# EAGLE board Lilypad_Kompakt-V25 (EAGLE 5.11)
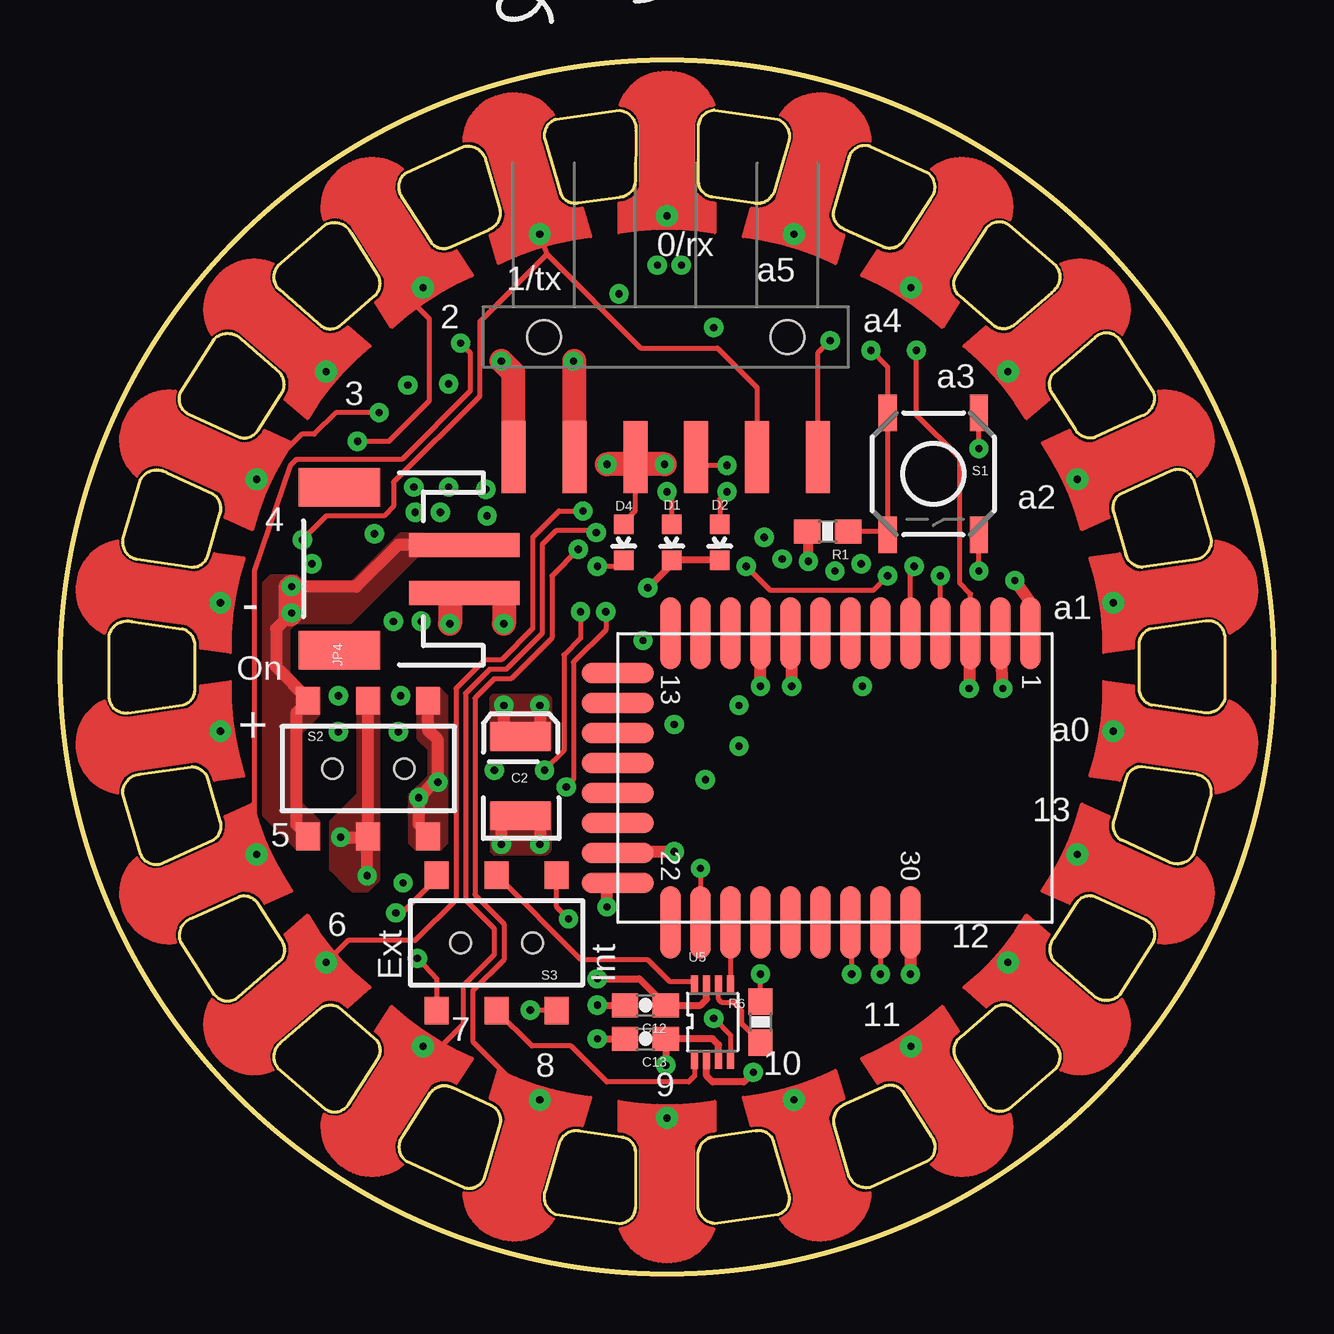
[diagram p0: board, top side]
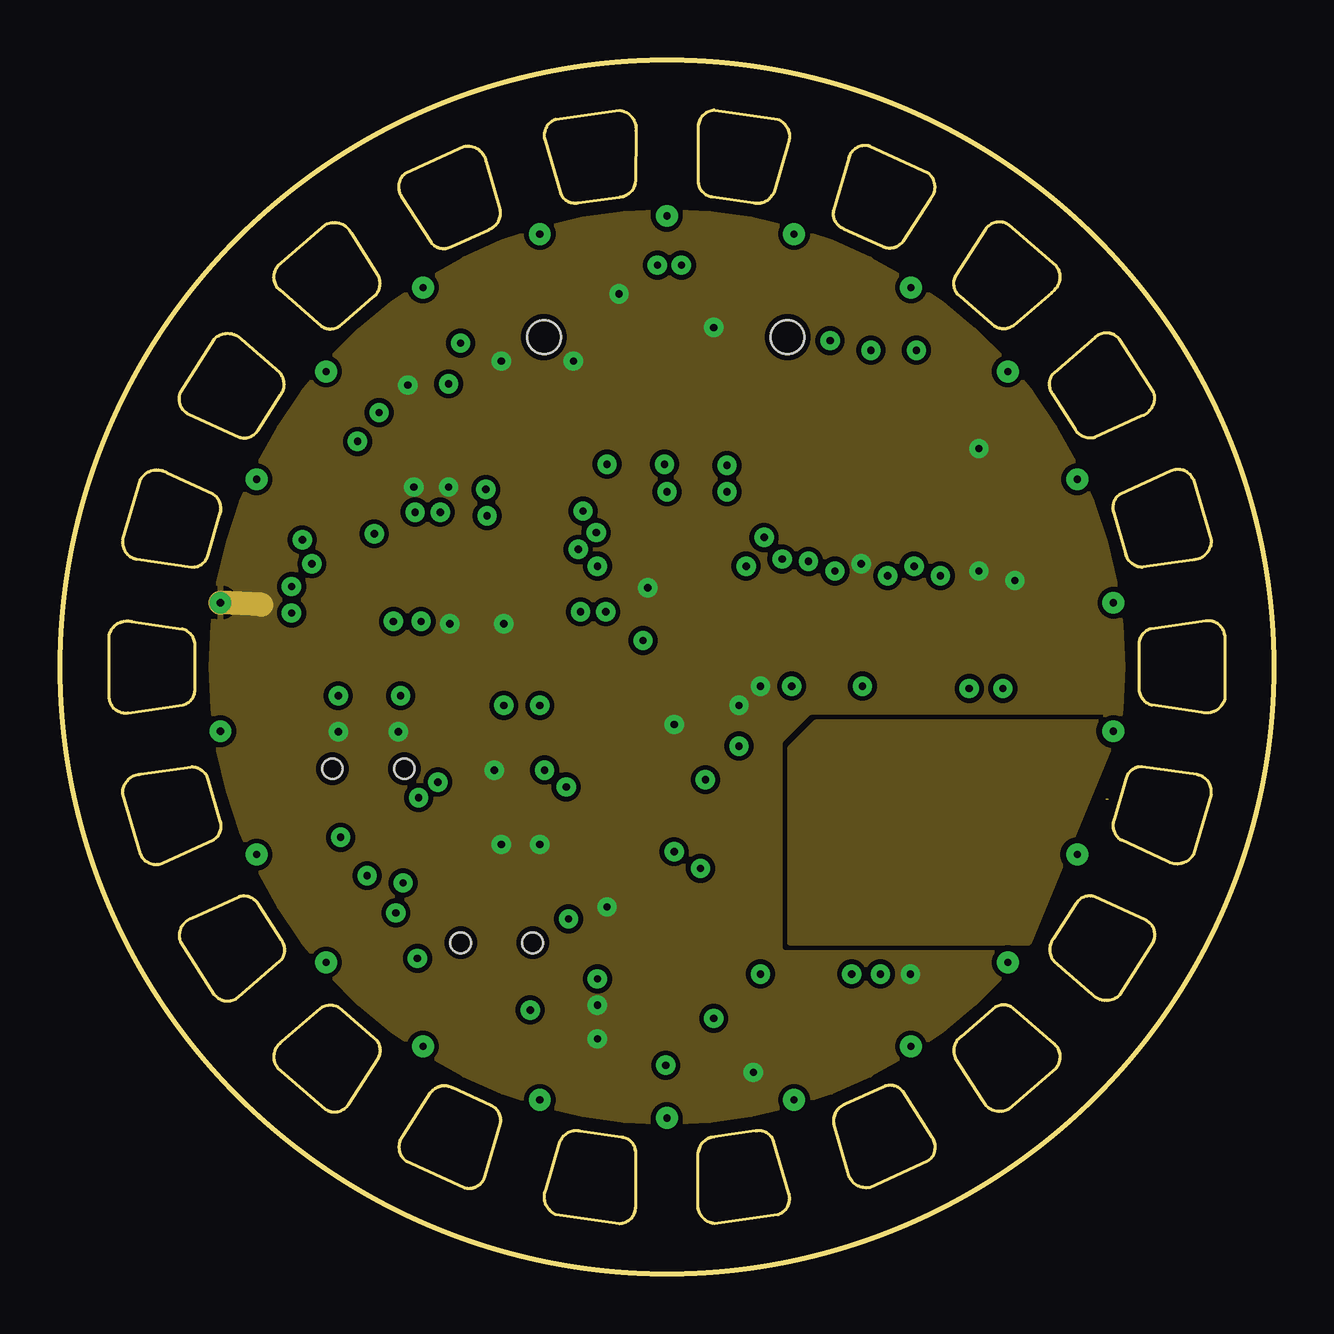
[diagram p1: board, inner layer Route2]
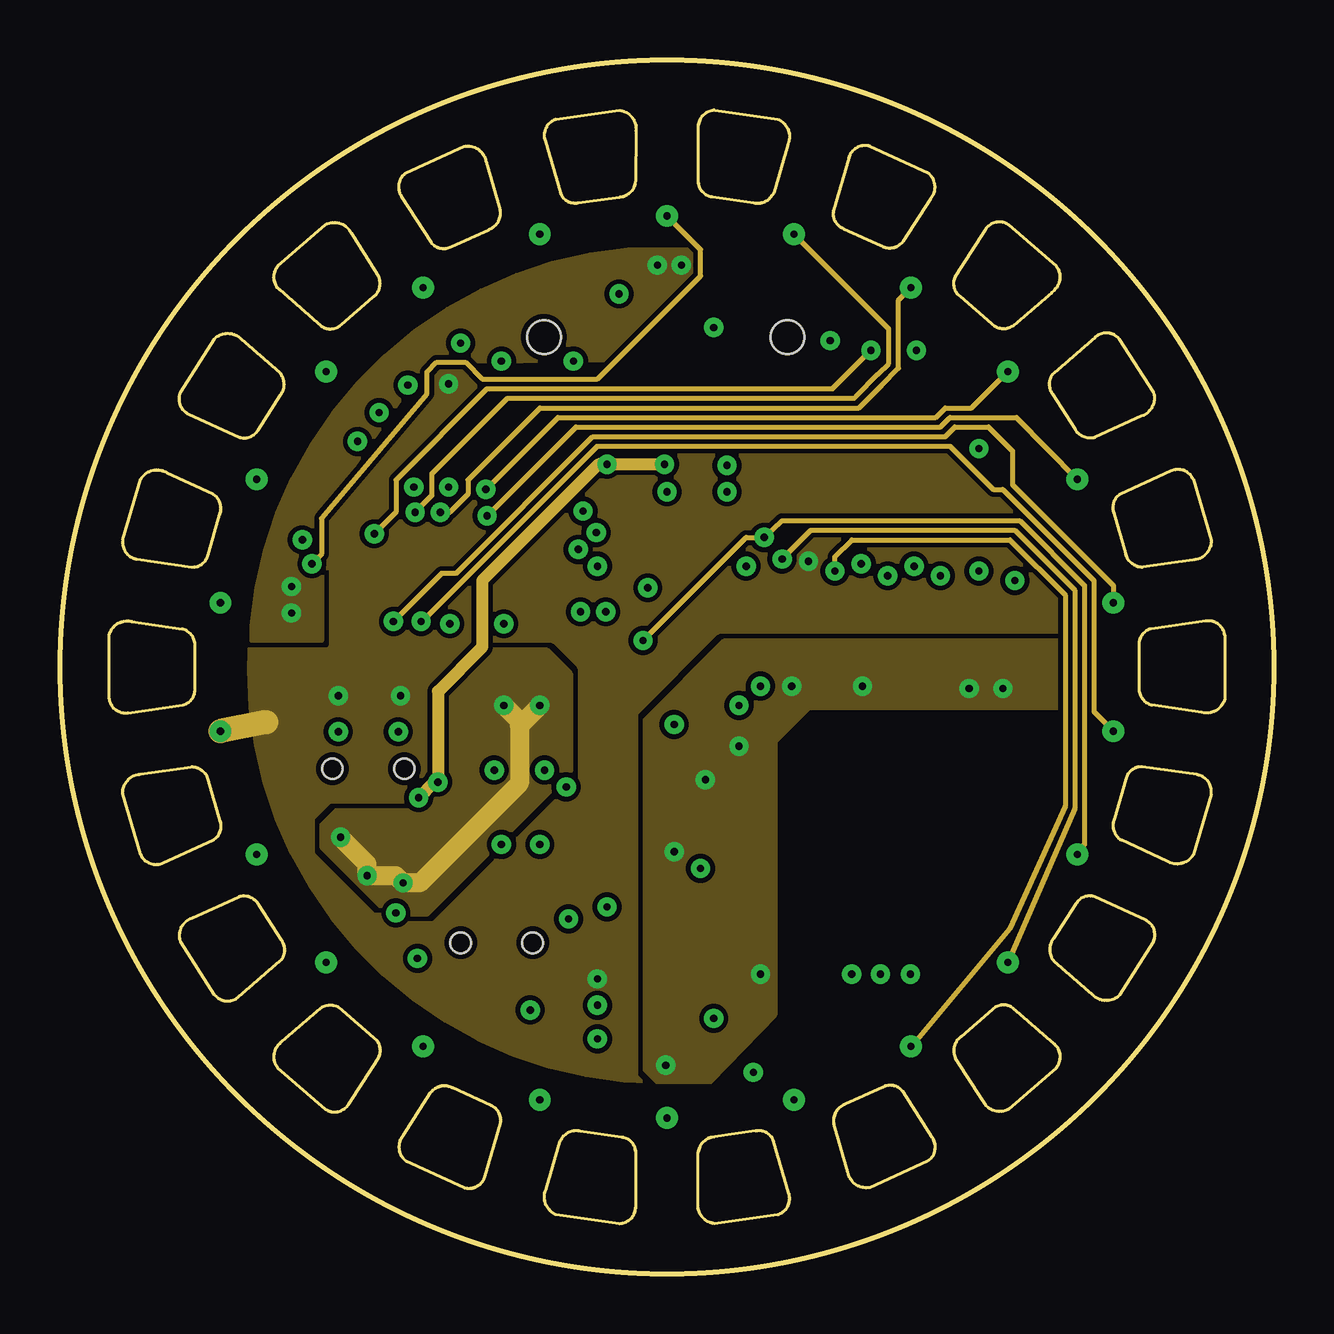
[diagram p2: board, inner layer Route15]
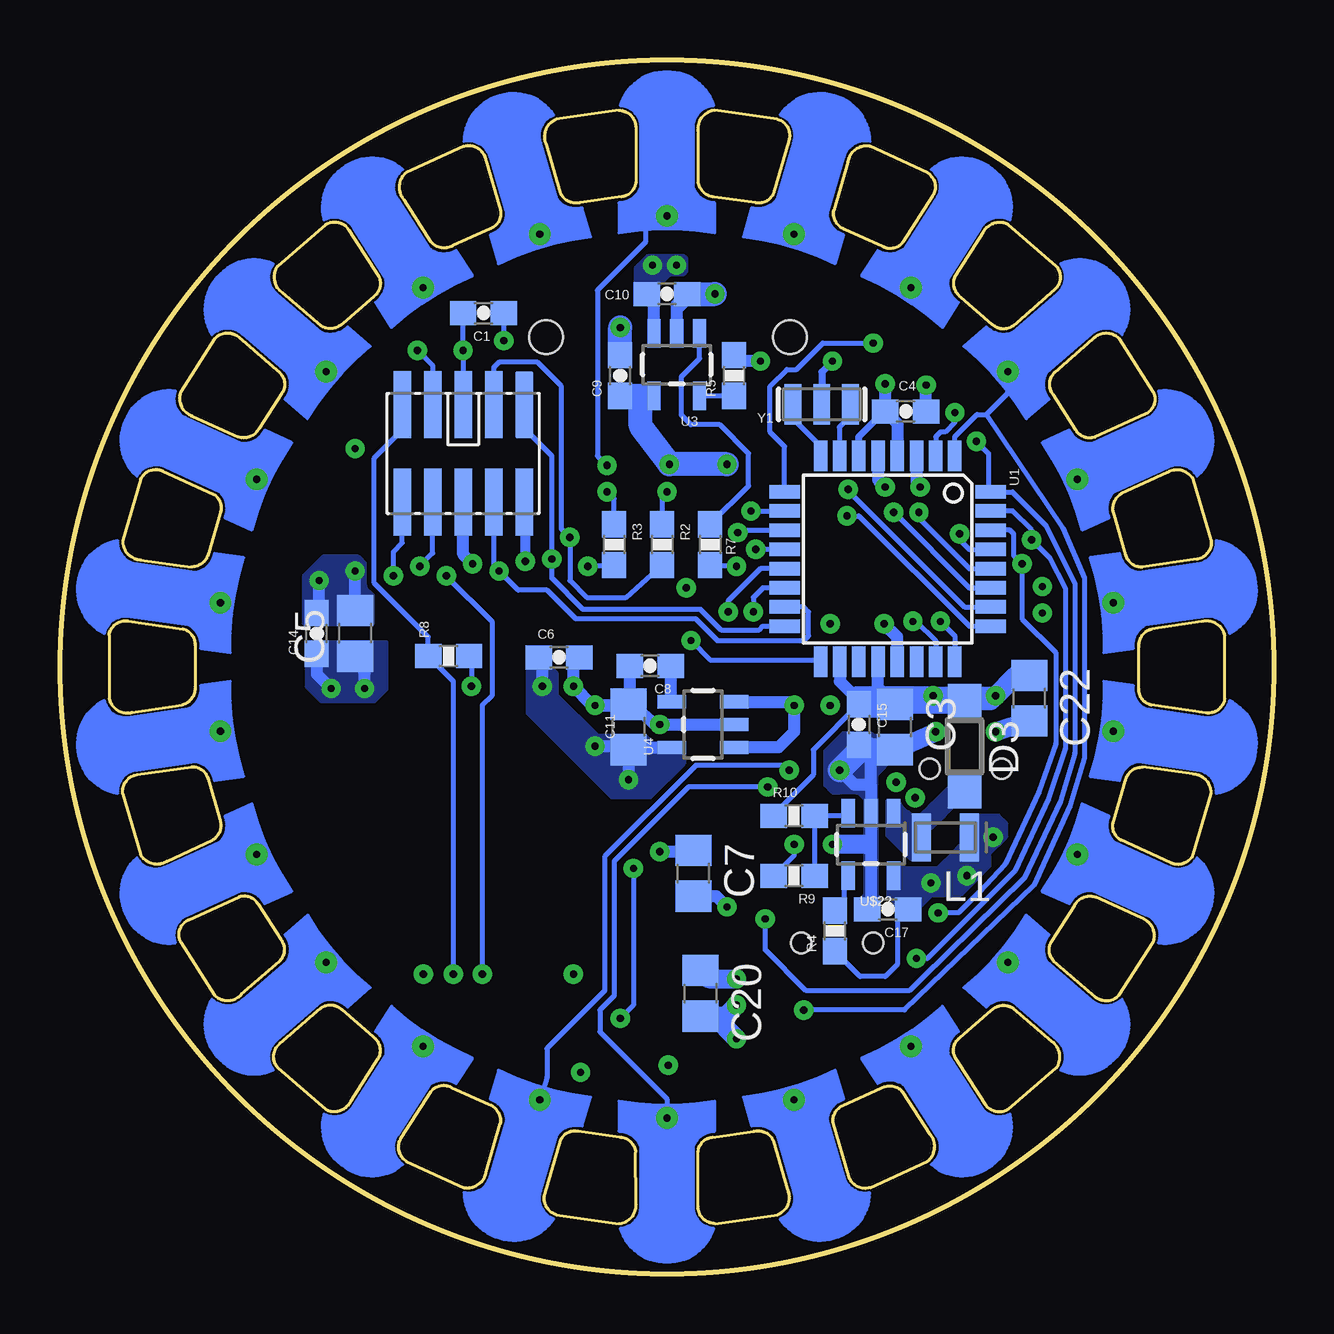
[diagram p3: board, bottom side, seen from below]

Size 50.6 x 50.6 mm. Coordinates in mm from the lower left corner, seen from the top.
Outline: circle at 25.3,25.3 radius 25.3
Copper layers (1*2+15*16): Top 0.035mm / dielectric 0.5mm / Route2 0.035mm / dielectric 0.5mm / Route15 0.035mm / dielectric 0.5mm / Bottom 0.035mm
Design rules "SparkFun *": minimum track width 0.2mm, minimum drill 0.3mm, track to track 0.2mm, track to pad 0.2mm, pad to pad 0.2mm, via to via 0.2mm, smd to smd 0.15mm, copper to edge 10mil, drill to drill 0.2mm, minimum pad ring 12mil, minimum via ring 10mil, stop-mask expansion 0.05mm, vias tented up to drill 0.35mm, thermal gap 10mil
Net classes: 0 default: width 0.2 mm, drill 0.3 mm, clearance 0.2 mm; 1 VCC: width 0.2 mm, drill 0.3 mm, clearance 0.2 mm
bRestrict: area 2.7,2.7 to 47.9,47.9; area 21.3,43.1 to 23.8,44.3; area 31.9,41.6 to 34.7,43.3; area 36.6,38.7 to 39.2,41; area 40.3,34.4 to 42.3,37.2; area 42.5,29.5 to 43.9,32.1; area 43.1,24.2 to 44.3,26.5; area 42.5,18.5 to 44,21.2; area 36.6,9.7 to 39.3,12; area 32,7.3 to 34.8,9; area 26.8,6.3 to 29.2,7.6; area 21.4,6.3 to 23.9,7.6; area 15.9,7.3 to 18.6,9; area 11.3,9.6 to 14.1,11.9; area 8.3,13.4 to 10.4,16.2; area 6.7,18.5 to 8.3,21.1; area 6.3,24 to 7.5,26.5; area 6.6,29.4 to 8.2,32; area 8.3,34.3 to 10.4,37.2; area 11.3,38.6 to 14,40.9; area 15.7,41.5 to 18.7,43.3; area 26.7,42.8 to 29.4,44.3; area 40.3,13.3 to 42.3,16.4; 22 lines

## Footprints (pad centres in the part's own frame; a part is rotated, then mirrored left to right if it is on the bottom)
0603-CAP = smd 1.1 x 1: 1 -0.85,0; 2 0.85,0
EIA3528 = smd 1.2 x 2.5: A 1.65,0; C -1.65,0
C0805 = smd 1.3 x 1.5: 1 -0.95,0; 2 0.95,0
FTSH-105-DV = smd 0.74 x 2.8: 1 -2.54,-2.03; 2 -2.54,2.03; 3 -1.27,-2.03; 4 -1.27,2.03; 5 0,-2.03; 6 0,2.03; 7 1.27,-2.03; 8 1.27,2.03; 9 2.54,-2.03; 10 2.54,2.03
LED-0603 = smd 0.8 x 0.8: A 0,-0.75; C 0,0.75
SOD123 = smd 1.4 x 1.4: A 1.9,0; C -1.9,0
LILYPAD-WEARABLES_PETAL-MOD-1-2SIDE = drill 0.3 pad 0.7 round: 1 2.9,0
1X06-SMD = smd 1 x 3: 1 -6.35,5; 2 -3.81,5; 3 -1.27,5; 4 1.27,5; 5 3.81,5; 6 6.35,5 | hole 1.4: -5.08,0; 5.08,0
JST-2-SMD = smd 1 x 4.6: 1 -1,-3.7; 2 1,-3.7 | smd 1.6 x 3.4: NC1 -3.4,1.5; NC2 3.4,1.5
CBC2518 = smd 0.8 x 2: 1 -1,0; 2 1,0
0603-RES = smd 1.1 x 1: 1 -0.85,0; 2 0.85,0
TACTILE_SWITCH_SMD = smd 1.524 x 0.762: 1 -2.54,1.905; 2 2.54,1.905; 3 -2.54,-1.905; 4 2.54,-1.905
AYZ0202 = smd 1 x 1.15: 1 -2.5,2.825; 2 0,2.825; 3 2.5,2.825; 4 -2.5,-2.825; 5 0,-2.825; 6 2.5,-2.825 | hole 0.85: 1.5,0; -1.5,0
TQFP32-08 = smd 1.27 x 0.559: 1 -4.293,2.8; 2 -4.293,2; 3 -4.293,1.2; 4 -4.293,0.4; 5 -4.293,-0.4; 6 -4.293,-1.2; 7 -4.293,-2; 8 -4.293,-2.8; 17 4.293,-2.8; 18 4.293,-2; 19 4.293,-1.2; 20 4.293,-0.4; 21 4.293,0.4; 22 4.293,1.2; 23 4.293,2; 24 4.293,2.8 | smd 0.559 x 1.27: 9 -2.8,-4.293; 10 -2,-4.293; 11 -1.2,-4.293; 12 -0.4,-4.293; 13 0.4,-4.293; 14 1.2,-4.293; 15 2,-4.293; 16 2.8,-4.293; 25 2.8,4.293; 26 2,4.293; 27 1.2,4.293; 28 0.4,4.293; 29 -0.4,4.293; 30 -1.2,4.293; 31 -2,4.293; 32 -2.8,4.293
BLE112-A = smd 3 x 0.85: AVDD1 -6.05,6.9; AVDD2 -6.05,5.65; GND1 -6.05,8.15; GND2 -6.05,-3.1; GND4 6,3.15; P0_0 6,0.65; P0_1 6,-0.6; P0_2 6,-1.85; P0_3 6,-3.1; P0_4 6,-4.35; P0_5 6,-5.6; P0_6 6,-6.85; P1_5 -6.05,-6.85; P1_6 -6.05,-0.6; P1_7 -6.05,0.65; P2_0 -6.05,1.9; P2_1 -6.05,3.15; P2_2 -6.05,4.4; RESET 6,1.9; USB+ -6.05,-4.35; USB- -6.05,-5.6; VDD_USB -6.05,-1.85 | smd 0.85 x 3: DVDD 3.1,-9.05; GND3 4.35,-9.05; P0_7 1.85,-9.05; P1_0 0.6,-9.05; P1_1 -0.65,-9.05; P1_2 -1.9,-9.05; P1_3 -3.15,-9.05; P1_4 -4.4,-9.05
SOT23-5 = smd 0.55 x 1.2: 1 -0.95,-1.3; 2 0,-1.3; 3 0.95,-1.3; 4 0.95,1.3; 5 -0.95,1.3
TI_DCU = smd 0.3 x 0.8: 1 -0.75,-1.55; 2 -0.25,-1.55; 3 0.25,-1.55; 4 0.75,-1.55; 5 0.75,1.55; 6 0.25,1.55; 7 -0.25,1.55; 8 -0.75,1.55
SPARKFUN_SOT23-5 = smd 0.55 x 1.2: 1 -0.95,-1.3; 2 0,-1.3; 3 0.95,-1.3; 4 0.95,1.3; 5 -0.95,1.3
RESONATOR-SMD = smd 0.7 x 1.7: 1 -1.2,0; 2 0,0; 3 1.2,0

## Placement (x,y rotation side)
$0000003  LOGO-LPLPA  [LOGO-LPA]  24.55,54.9 0 top  (outside the outline)
C1  0.1uF  [0603-CAP]  32.95,40.05 180 bottom
C2  47uF  [EIA3528]  19.2,20.75 90 top
C3  10uF  [C0805]  15.8,22.8 270 bottom
C4  0.1uF  [0603-CAP]  15.35,35.95 0 bottom
C5  22uF  [C0805]  38.3,26.7 90 bottom
C6  0.1uF  [0603-CAP]  29.8,25.7 0 bottom
C7  22uF  [C0805]  24.2,16.7 270 bottom
C8  0.1uF  [0603-CAP]  26,25.35 180 bottom
C9  4.7uF  [0603-CAP]  27.25,37.45 90 bottom
C10  4.7uF  [0603-CAP]  25.3,40.85 0 bottom
C11  10uF  [C0805]  26.9,22.8 90 bottom
C12  0.1uF  [0603-CAP]  24.4,11.2 180 top
C13  0.1uF  [0603-CAP]  24.4,9.8 180 top
C14  0.1uF  [0603-CAP]  39.9,26.7 90 bottom
C15  0.1uF  [0603-CAP]  17.3,22.9 270 bottom
C17  1uF  [0603-CAP]  16.1,15.2 180 bottom
C20  22uF  [C0805]  23.9,11.7 270 bottom
C22  22uF  [C0805]  10.2,24 270 bottom
CC-DEBUGGER  CONN_5-2-FTSH-V  [FTSH-105-DV]  33.79,34.2 180 bottom
D1  Status  [LED-0603]  25.5,30.5 180 top
D2  Status  [LED-0603]  27.5,30.5 180 top
D3  MBR0520LT  [SOD123]  12.9,22 270 bottom
D4  Yellow  [LED-0603]  23.5,30.5 180 top
GND  LILYPAD-WEARABLES_SEWTAP1  [LILYPAD-WEARABLES_PETAL-MOD-1-2SIDE]  3.82,28.39 351.8 top
JP1  ASP_CON  [1X06-SMD]  25.25,39.05 180 top
JP4  LiPo  [JST-2-SMD]  13.15,29.39 90 top
L1  10uH  [CBC2518]  13.7,18.2 180 bottom
R1  10K  [0603-RES]  32,30.95 180 top
R2  1k  [0603-RES]  25.5,30.4 270 bottom
R3  1k  [0603-RES]  27.5,30.4 270 bottom
R4  51.1k  [0603-RES]  18.3,14.3 90 bottom
R5  1k  [0603-RES]  22.5,37.45 90 bottom
R6  10K  [0603-RES]  29.2,10.5 270 top
R7  1k  [0603-RES]  23.5,30.4 270 bottom
R8  10K  [0603-RES]  34.4,25.75 0 bottom
R9  10k  [0603-RES]  20,16.6 180 bottom
R10  30.9k  [0603-RES]  20,19.1 0 bottom
S1  TAC_SWITCH  [TACTILE_SWITCH_SMD]  36.4,33.35 270 top
S2  On/Off  [AYZ0202]  12.85,21.06 0 top
S3  On/Off  [AYZ0202]  18.2,13.8 180 top
U1  ATMEGA328  [TQFP32-08]  16.1,29.8 270 bottom
U2  BLE112-A  [BLE112-A]  32.3,20.65 270 top
U3  MCP73831  [SOT23-5]  24.89,37.9 180 bottom
U4  MIC5205-3.3  [SOT23-5]  23.8,22.9 90 bottom
U5  TXB0102  [TI_DCU]  27.2,10.5 0 top
U$1  LILYPAD-WEARABLES_SEWTAP1  [LILYPAD-WEARABLES_PETAL-MOD-1-2SIDE]  46.78,22.21 171.8 top
U$2  LILYPAD-WEARABLES_SEWTAP1  [LILYPAD-WEARABLES_PETAL-MOD-1-2SIDE]  46.78,28.39 188.2 top
U$3  LILYPAD-WEARABLES_SEWTAP1  [LILYPAD-WEARABLES_PETAL-MOD-1-2SIDE]  45.04,34.32 204.5 top
U$4  LILYPAD-WEARABLES_SEWTAP1  [LILYPAD-WEARABLES_PETAL-MOD-1-2SIDE]  41.7,39.51 220.9 top
U$5  LILYPAD-WEARABLES_SEWTAP1  [LILYPAD-WEARABLES_PETAL-MOD-1-2SIDE]  37.04,43.56 237.3 top
U$6  LILYPAD-WEARABLES_SEWTAP1  [LILYPAD-WEARABLES_PETAL-MOD-1-2SIDE]  31.41,46.13 253.7 top
U$7  LILYPAD-WEARABLES_SEWTAP1  [LILYPAD-WEARABLES_PETAL-MOD-1-2SIDE]  25.3,47 270 top
U$8  LILYPAD-WEARABLES_SEWTAP1  [LILYPAD-WEARABLES_PETAL-MOD-1-2SIDE]  19.19,46.13 286.3 top
U$9  LILYPAD-WEARABLES_SEWTAP1  [LILYPAD-WEARABLES_PETAL-MOD-1-2SIDE]  13.56,43.56 302.7 top
U$10  LILYPAD-WEARABLES_SEWTAP1  [LILYPAD-WEARABLES_PETAL-MOD-1-2SIDE]  8.9,39.51 319.1 top
U$11  LILYPAD-WEARABLES_SEWTAP1  [LILYPAD-WEARABLES_PETAL-MOD-1-2SIDE]  5.56,34.32 335.5 top
U$12  LILYPAD-WEARABLES_SEWTAP1  [LILYPAD-WEARABLES_PETAL-MOD-1-2SIDE]  5.56,16.28 24.5 top
U$13  LILYPAD-WEARABLES_SEWTAP1  [LILYPAD-WEARABLES_PETAL-MOD-1-2SIDE]  8.9,11.09 40.9 top
U$14  LILYPAD-WEARABLES_SEWTAP1  [LILYPAD-WEARABLES_PETAL-MOD-1-2SIDE]  13.56,7.04 57.3 top
U$15  LILYPAD-WEARABLES_SEWTAP1  [LILYPAD-WEARABLES_PETAL-MOD-1-2SIDE]  19.19,4.47 73.7 top
U$16  LILYPAD-WEARABLES_SEWTAP1  [LILYPAD-WEARABLES_PETAL-MOD-1-2SIDE]  25.3,3.6 90 top
U$17  LILYPAD-WEARABLES_SEWTAP1  [LILYPAD-WEARABLES_PETAL-MOD-1-2SIDE]  31.41,4.47 106.3 top
U$18  LILYPAD-WEARABLES_SEWTAP1  [LILYPAD-WEARABLES_PETAL-MOD-1-2SIDE]  37.04,7.05 122.7 top
U$19  LILYPAD-WEARABLES_SEWTAP1  [LILYPAD-WEARABLES_PETAL-MOD-1-2SIDE]  41.7,11.09 139.1 top
U$20  LILYPAD-WEARABLES_SEWTAP1  [LILYPAD-WEARABLES_PETAL-MOD-1-2SIDE]  3.82,22.21 8.2 top
U$21  LILYPAD-WEARABLES_SEWTAP1  [LILYPAD-WEARABLES_PETAL-MOD-1-2SIDE]  45.04,16.28 155.5 top
U$22  LM2733  [SPARKFUN_SOT23-5]  16.8,17.9 180 bottom
Y1  RESONATORSMD  [RESONATOR-SMD]  18.85,36.25 180 bottom

## Library data of the parts
$0000003 = LilyPad-Wearables
C1 C2 C4 C6 C8-C10 C12-C15 C17 D1 D2 D4 JP1 JP4 R1-R10 S1-S3 U1 U3 U4 Y1 = SparkFun
C3 C5 C7 C11 C20 C22 = rcl
CC-DEBUGGER = pel_misc
D3 L1 U5 U$22 = Lilypad_Kompakt-V25
GND U$1-U$21 = Kopie_von_Lilypad_Kompakt-V25
U2 = sf-bluegiga

## Nets
3.3V: C5.1 C6.1 C7.1 C11.1 C13.1 C14.1 CC-DEBUGGER.7 R6.1 R8.2 U2.AVDD1 U2.AVDD2 U2.DVDD U2.VDD_USB U4.5 U5.3
5V: C3.1 C4.1 C12.1 C15.1 C20.1 C22.1 CC-DEBUGGER.2 D3.C R1.2 R10.1 U1.4 U1.6 U1.18 U1.20 U5.7 U$20.1
A0: U1.23 U$1.1
A1: U1.24 U$2.1
A2: U1.25 U$3.1
A3: U1.26 U$4.1
A4: U1.27 U$5.1
A5: U1.28 U$6.1
D2: S3.4 U1.32 U$9.1
D3: S3.1 U1.1 U$10.1
D4: U1.2 U$11.1
D5: U1.9 U$12.1
D6: U1.10 U$13.1
D7: U1.11 U$14.1
D8: U1.12 U$15.1
D9: U1.13 U$16.1
D10: U1.14 U$17.1
DTR: C1.1 JP1.1
FTDI_VCC [VCC]: C9.1 D4.A JP1.4 S2.3 S2.6 U3.4
GND [VCC]: C2.C C3.2 C4.2 C5.2 C6.2 C7.2 C8.2 C9.2 C10.2 C11.2 C12.2 C13.2 C14.2 C15.2 C17.2 C20.2 C22.2 CC-DEBUGGER.6 D1.C D2.C GND.1 JP1.5 JP1.6 JP4.1 R5.2 R9.2 S1.1 S1.2 U1.3 U1.5 U1.21 U2.GND1 U2.GND2 U2.GND3 U2.GND4 U3.2 U4.2 U5.2 U$22.2 Y1.2
MISO: CC-DEBUGGER.1 U1.16 U$19.1
MOSI: CC-DEBUGGER.4 U1.15 U$18.1
N$1: U1.7 Y1.1
N$2: D1.A R2.1
N$3: U1.8 Y1.3
N$4: D2.A R3.1
N$5: C8.1 U4.4
N$6: R6.2 U5.6
N$7: R4.2 U$22.4
N$8: D4.C R7.2
N$10: R9.1 R10.2 U$22.3
N$14: D3.A L1.2 U$22.1
P0_0: R3.2 U2.P0_0
P2_1: CC-DEBUGGER.8 U2.P2_1
P2_2: CC-DEBUGGER.10 U2.P2_2
PROG: R5.1 U3.5
RST: C1.2 CC-DEBUGGER.5 R1.1 S1.3 S1.4 U1.29
RST_BLE: CC-DEBUGGER.9 R8.1 U2.RESET
RX: JP1.3 S3.6 U1.30 U$7.1
RXB: U2.P0_5 U5.4
RXB-LS: S3.2 U5.1
SCK: CC-DEBUGGER.3 R2.2 U1.17 U$21.1
STAT: R7.1 U3.1
TX: JP1.2 S3.3 U1.31 U$8.1
TXB: U2.P0_4 U5.5
TXB-LS: S3.5 U5.8
VBATT: C10.1 JP4.2 S2.1 S2.4 U3.3
VCC [VCC]: C2.A C17.1 L1.1 R4.1 S2.2 S2.5 U4.1 U4.3 U$22.5

## Tracks (layer width: path | path; a pad name or v marks a point on that pad's centre or on a via)
3.3V  (via drill 0.3 pad 0.6, 0.3 pad 0.7)
  Top 0.2: R6.1 v29.2,12.5 | U2.AVDD2 37.95,28.35 37.5,28.8 37.5,34 35.7,35.8 v35.7,38.5
  Top 0.3: U5.3 27.45,9.55 27.2,9.8 C13.1 v25.25,8.7
  Top 0.5: U2.DVDD 23.3,17.6 v25.6,17.6 | U2.VDD_USB 30.5,26.65 v30.5,24.5 | v39.3,24.4 U2.AVDD1 | U2.AVDD2 37.9,26.65 v37.9,24.4
  Bottom 0.2: R8.2 33.45,25.65 v33.45,24.5 | CC-DEBUGGER.7 35.06,37.86 v35.7,38.5
  Bottom 0.5: C11.1 26.95,22 v28.3,22 | C7.1 24.25,17.6 v25.6,17.6 | C11.1 v26.9,20.6 | C6.1 30.5,25.55 v30.5,24.5 | C5.1 37.9,25.05 v37.9,24.4 | U4.5 26.9,21.95 C11.1 | C14.1 39.9,25 v39.3,24.4
  pour Route15: 27.7,26.4 41.7,26.4 41.7,23.6 31.2,23.6 29.8,22.2 29.8,10.8 27.1,8 24.9,8 24.4,8.5 24.4,23.1
  pour Bottom (no thermals): 37.6,26.3 40.3,26.3 40.3,25.9 40.3,24.5 39.8,24 39.7,23.9 37.7,23.9 37.5,23.9 37,24.4 37,26.3
  pour Bottom (no thermals): 24.6,22.1 25.9,22.1 26.2,22.4 28.2,22.4 29.9,24.1 29.9,25 30.2,25.3 31.1,25.3 31.1,23.4 27.6,19.9 26,19.9 24.6,21.3
5V  (via drill 0.3, 0.3 pad 0.7)
  Top 0.3: U5.7 26.95,11.45 26.7,11.2 C12.1 24.15,12.3 v22.4,12.3
  Top 0.406: R1.2 31.2,30.95 v31.2,29.7
  Route15 1: 8.6,23 U$20.1
  Bottom 0.2: R10.1 20.85,19.15 19.2,20.8 19.2,21.85 C15.1
  Bottom 0.3: C4.1 16.25,35.95 17.3,34.9 U1.6 | 17.3,23.6 17.3,23.65
  Bottom 0.406: CC-DEBUGGER.2 31.2,32.17 v31.2,29.7
  Bottom 0.5: 16.51,25.51 U1.20 16.5,24.45 | v16.2,37.1 C4.1 15.7,35.45 U1.4 | 16.5,24.45 C3.1 | U1.18 18.1,24.7 17.3,23.9 C15.1 | C15.1 17.3,23.6 | 16.5,24.45 16.5,24.35 C15.1
  Bottom 0.8: C22.1 10.75,24.95 v11.6,24.1 | v14.2,24.1 v11.6,24.1 | 14.55,23.75 v14.2,24.1 | 14.55,23.75 C3.1 15.95,23.6 17.3,23.6 | v11.6,24.1 11.8,23.9 12.5,23.9 | 12.5,23.9 D3.C | 14.55,23.75 12.65,23.75 12.5,23.9 | v14.2,24.1 17.4,24.1 | C20.1 23.55,12.3 v22.4,12.3
  pour Route15 (rank 6): 25.3,42.7 arc-90 42.4,25.6 42.4,25.4 42.4,25.1 arc-90 25.3,8 25.1,8 arc-90 7.9,25.2 7.9,25.3 arc-90
A0  (via drill 0.3 pad 0.7)
  Route15 0.2: U$1.1 43.1,23.44 43.1,27.7 43.1,28.5 43.1,28.9 39.3,32.7 38.9,32.7 37.1,34.5 22.4,34.5 15.1,27.2 v15.05,27.2
  Bottom 0.2: U1.23 14.1,26.4 14.9,27.2 v15.05,27.2
A1  (via drill 0.3 pad 0.7)
  Route15 0.2: U$2.1 43.91,28.69 39.7,32.9 39.7,34.3 38.7,35.3 37.3,35.3 36.9,34.9 22.2,34.9 16.5,29.2 15.9,29.2 v13.9,27.2
  Bottom 0.2: U1.24 13.3,26.6 v13.9,27.2
A2  (via drill 0.3 pad 0.7)
  Route15 0.2: U$3.1 39.87,35.7 37.1,35.7 36.7,35.3 21.5,35.3 v17.8,31.6
  Bottom 0.2: U1.25 12.7,27 17.3,31.6 v17.8,31.6
A3  (via drill 0.3 pad 0.7)
  Route15 0.2: U$4.1 38,36.1 36.9,36.1 36.5,35.7 20.75,35.7 v17.75,32.7
  Bottom 0.2: U1.26 12.9,27.8 17.75,32.65 v17.75,32.7
A4  (via drill 0.3 pad 0.7)
  Route15 0.2: U$5.1 34.95,40.59 34.95,37.75 34.25,37.05 33.4,36.2 33.3,36.1 20,36.1 17,33.1 17,32.5 16.25,31.75 v15.85,31.75
  Bottom 0.2: 12.6,28.6 U1.27 12.7,28.6 v15.85,31.75
A5  (via drill 0.3 pad 0.7)
  Route15 0.2: v14.8,31.75 15.49,32.44 15.49,33.34 18.65,36.5 33.1,36.5 33.2,36.6 34.1,37.5 34.55,37.95 34.55,39.39 U$6.1
  Bottom 0.2: U1.28 12.7,29.4 14.8,31.5 v14.8,31.75
D2  (via drill 0.3 pad 0.7)
  Top 0.2: 20.68,16.6 S3.4 20.7,15.3 v21.2,14.8 | U$9.1 14.7,40.69 14.7,40.5 15.4,39.8 15.4,36.4 13.7,34.7 v12.4,34.7
  Bottom 0.2: v21.2,14.8 21.2,13.5 19.5,11.8 15.2,11.8 14.7,12.3 10.4,16.5 8.9,19.7 8.3,21.7 8.3,28.8 9.5,31.2 10.9,32.6 U1.32 11.9,32.6 11.9,34.2 v12.4,34.7
D3  (via drill 0.3 pad 0.7)
  Top 0.2: S3.1 20.68,11 v19.6,11
  Bottom 0.2: v19.6,11 15.4,11 10,16.2 8.5,19.5 7.9,21.5 7.9,29 8.8,31.1 11.98,35.82 | U1.1 13.3,34.9 12.38,35.82 11.98,35.82 | 11.98,35.82 11.09,36.71 U$10.1
D4  (via drill 0.3 pad 0.7)
  Top 0.2: U$11.1 10.08,35 10.6,35 11.5,35.9 v13.3,35.9
  Bottom 0.2: U1.2 14.1,34.9 13.9,35.1 13.7,35.1 13.3,35.5 v13.3,35.9
D5  (via drill 0.3)
  Top 0.2: 8.2,17.4 U$12.1 8.1,17.58 8.1,29.3 9.6,33.7 9.85,33.95 14.25,33.95 17.1,36.8 17.1,38.4 v16.7,38.8
  Bottom 0.2: U1.9 20.39,34.49 21,35.1 21,37 20.3,37.7 19.9,37.7 18.8,38.8 v16.7,38.8
D6  (via drill 0.3 pad 0.7)
  Top 0.2: v21.8,31.8 20.8,31.8 19.7,30.7 19.7,26.9 18.4,25.6 17.7,25.6 16.5,24.4 16.5,15.6 14.8,13.9 12.01,13.9 U$13.1
  Bottom 0.2: v21.8,31.8 U1.10
D7  (via drill 0.3 pad 0.7)
  Top 0.2: v22.35,30.9 22.25,31 20.7,31 20.1,30.4 20.1,26.7 18.6,25.2 17.9,25.2 16.9,24.2 16.9,15.6 18.1,14.4 18.1,13.3 16.8,12 16.8,10.4 15.88,9.48 U$14.1 15.51,9.1 16.1,9.1
  Bottom 0.2: U1.11 22.25,31 v22.35,30.9
D8  (via drill 0.3 pad 0.7)
  Top 0.2: v21.6,30.2 20.5,29.1 20.5,26.5 18.8,24.8 18.1,24.8 17.3,24 17.3,15.8 18.5,14.6 18.5,13.1 17.2,11.8 17.2,9.7 19.64,7.26 U$15.1
  Bottom 0.2: U1.12 v21.6,30.2
D9  (via drill 0.3 pad 0.7)
  Top 0.2: v22.75,27.6 22.75,26.85 21.4,25.5 21.4,20.6 v21.1,20.3
  Bottom 0.2: U1.13 21.4,29.4 22.75,28.05 v22.75,27.6 | 24.8,7 U$16.1 25.3,7.3 28.1,10.1 28.1,11 27.5,11.6 27.5,17.2 24.4,20.3 v21.1,20.3
D10  (via drill 0.3 pad 0.7)
  Top 0.2: v21.7,27.6 21.7,26.5 21,25.8 21,21.8 v20.2,21
  Bottom 0.2: v21.7,27.6 21.7,28.2 21.3,28.6 U1.14 | U$17.1 30.3,8.2 30.3,9.4 27.9,11.8 27.9,17.4 24.1,21.2 20.4,21.2 v20.2,21
DTR  (via drill 0.3 pad 0.7)
  Top 0.2: JP1.1 31.6,38.4 v32.1,38.9
  Bottom 0.2: v32.1,38.9 C1.1
FREI
  Route2 0: 43.6,19.8 43.7,19.8
  pour Route2 (isolate 0.254, no thermals): 30.4,13.8 40.4,13.8 44.2,23 31.5,23 30.4,21.9
  pour Route15 (no thermals): 11.4,21.7 arc-90 12,21 arc-90 11.3,20.4 arc-90 10.7,21.1 arc-90
  pour Route2 (no thermals): 14.4,21.7 arc-90 15,21 arc-90 14.3,20.4 arc-90 13.7,21.1 arc-90
  pour Route2 (no thermals): 11.4,21.7 arc-90 12,21 arc-90 11.3,20.4 arc-90 10.7,21.1 arc-90
  pour Route15 (no thermals): 14.4,21.7 arc-90 15,21 arc-90 14.3,20.4 arc-90 13.7,21.1 arc-90
  pour Route15 (no thermals): 20.2,40 arc-90 21.1,39 arc-90 20.1,38.1 arc-90 19.25,39.1 arc-90
  pour Route2 (no thermals): 30.4,40 arc-90 31.25,39 arc-90 30.3,38.1 arc-90 29.4,39.1 arc-90
  pour Route2 (no thermals): 20.2,40 arc-90 21.1,39 arc-90 20.1,38.1 arc-90 19.25,39.1 arc-90
  pour Route15 (no thermals): 16.75,14.45 arc-90 17.35,13.75 arc-90 16.65,13.15 arc-90 16.05,13.85 arc-90
  pour Route15 (no thermals): 19.75,14.45 arc-90 20.35,13.75 arc-90 19.65,13.15 arc-90 19.05,13.85 arc-90
  pour Route2 (no thermals): 16.75,14.45 arc-90 17.35,13.75 arc-90 16.65,13.15 arc-90 16.05,13.85 arc-90
  pour Route2 (no thermals): 19.75,14.45 arc-90 20.35,13.75 arc-90 19.65,13.15 arc-90 19.05,13.85 arc-90
FTDI_VCC  (via drill 0.3 pad 0.7)
  Top 0.2: JP1.4 23.98,31.82 23.5,31.34 D4.A
  Top 0.5: 24.03,34.1 JP1.4 23.68,33.75 | 24,34.15 23.9,33.8 | S2.6 15.4,18.29 14.95,18.73 v14.95,19.85 15.6,20.5 v15.75,20.5 15.75,22.25 15.35,22.65 S2.3
  Top 1: 23.68,33.75 v22.8,33.75 | 24.18,33.85 JP1.4 24,34.07 24,34.15 | v25.2,33.75 23.95,33.75 23.9,33.7
  Route15 0.5: v25.2,33.75 v22.8,33.75 22.45,33.75 17.6,28.9 17.6,26.14 15.75,24.29 v15.75,20.5 15.6,20.5 v14.95,19.85
  Bottom 0.5: 26.14,36.6 U3.4
  Bottom 1: 26.4,36.6 C9.1 | 26.4,36.6 26.14,36.6 | 26.4,36.6 26.4,35.35 v25.2,33.75 v22.8,33.75
  pour Top (no thermals): 14.95,24.15 14.95,22.35 15.4,21.9 15.4,20.7 14.6,19.9 14.6,18 14.85,17.75 15.85,17.75 16.1,18 16.1,24.05 15.8,24.35 15.15,24.35
GND  (via drill 0.3 pad 0.7)
  Top 0.2: JP4.1 16.7,28.39 | S1.1 v38.3,34.41 v38.3,34.4 | S1.2 v38.3,29.3 | 35.5,14.7 U2.GND4
  Top 0.3: D2.C D1.C 25.5,29.6 v24.5,28.6 | v22.4,9.8 C13.2 | v22.4,11.2 C12.2 | U5.2 26.95,8.25 27.2,8 28.5,8 v28.9,8.4
  Top 0.5: 16.25,28.39 JP4.1 18.5,28.39 | 21.44,38.05 v21.4,38.05 | v18.4,17.9 18.4,19.1 C2.C 20,19.1 v20,17.9 | U2.GND3 22.8,16.05 v22.8,15.3 | v29.2,24.5 U2.GND2 | U2.GND1 40.5,26.65 40.5,27.9 v39.8,28.9 | U2.GND4 v35.45,12.5
  Top 1: 16.25,28.39 v16.25,27.1 | 18.5,28.39 v18.5,27.1 | JP1.5 21.44,38.05 | JP1.6 18.9,37.55 v18.4,38.05
  Route2 1: 8.4,27.9 GND.1
  Bottom 0.2: R9.2 20,17.45 v20,17.9
  Bottom 0.3: Y1.2 18.85,37.6 v18.4,38.05
  Bottom 0.5: 24.89,40.21 24.89,40.41 C10.2 | v28.3,23.7 26.95,23.7 C11.2 26.85,23.7 C8.2 | v16.25,27.1 15.71,26.56 U1.21 | CC-DEBUGGER.6 33.79,29.99 v33.4,29.6 | R5.2 22.5,38.05 v21.4,38.05 | U4.2 25.8,22.9 26.7,23.7 v28.3,23.7 | C7.2 23.25,15.75 v22.8,15.3 | C6.2 29.2,25.45 v29.2,24.5 28.4,23.7 v28.3,23.7 | C4.2 v14.5,37.05 | 38.6,27.8 C5.2 v38.3,29.3 | U1.5 16.5,33.1 v16.2,32.8 | U1.3 14.9,33 v14.75,32.8 | U3.2 24.89,40.21 | 24.89,40.21 24.3,40.8 | 16.8,20.4 16.8,21.85 | 16.8,20.4 U$22.2 16.8,18.1 | v18.1,21 17.5,20.4 16.8,20.4 | 16.8,18.1 17,17.9 | C17.2 16.8,15.35 16.8,18.1 | C14.2 39.8,27.65 v39.8,28.9
  Bottom 0.8: C22.2 v11.6,22.6 | C3.2 v14.1,22.6 | 17,17.9 v18.4,17.9 | C20.2 23.75,10.75 23.35,10.75 | 23.35,10.75 22.85,10.75 v22.4,11.2 | 23.35,10.75 v22.4,9.8
  Bottom 1: C9.2 v27.25,39.45 | C10.2 v23.3,40.85 | v18.1,21 17.3,21.8 | C15.2 16.8,21.85 C3.2
  other vias: 25.6,22.9
  pour Route2 (rank 6): 25.3,44.3 arc-90 44.3,25.3 arc-90 25.3,6.3 arc-90 6.3,25.3 arc-90
  pour Top (no thermals): 18,18.4 18,17.65 18.1,17.55 20.25,17.55 20.4,17.7 20.4,19.6 18,19.6
  pour Bottom (no thermals): 37.6,28 37.6,27.1 37.7,27.1 40.4,27.1 40.4,29.1 39.6,29.9 38.2,29.9 37.9,29.6 37.9,28.6 37.6,28.3
  pour Bottom (no thermals): 16.6,19.7 16.6,20.8 15.9,21.5 15.9,22.4 16.7,22.4 16.8,22.5 18,22.5 18.7,21.8 18.7,20.4 18.4,20.1 17.3,20.1 16.9,19.7
  pour Bottom (no thermals): 16.6,19.8 16.6,15.8 16.5,15.7 16.5,15.2 17.2,15.2 17.2,15.6 17,15.8 17,19.8
MISO  (via drill 0.3 pad 0.7)
  Route15 0.2: v30.1,29.8 31.3,31 39.8,31 42.3,28.5 42.3,19.4 U$19.1
  Bottom 0.2: CC-DEBUGGER.1 31.25,35.25 30.1,34.1 v30.1,29.8 30.1,29 28.8,27.7 23.9,27.7 23.05,26.85 21.45,26.85 21.3,27 U1.16
MOSI  (via drill 0.3 pad 0.7)
  Route15 0.2: v32.3,29.3 32.3,29.9 33,30.6 39.6,30.6 41.9,28.3 41.9,19.5 39.6,14.4 35.49,9.49 U$18.1
  Bottom 0.2: CC-DEBUGGER.4 32.5,32.15 32.5,29.5 v32.3,29.3 31.5,28.5 30.3,28.5 29.1,27.3 24.1,27.3 23.2,26.4 19.6,26.4 19.4,26.6 19.4,27.6 19.6,27.8 U1.15
N$1
  Bottom 0.2: Y1.1 17.9,36 17.9,35.5 18.11,35.29 18.1,35.28 U1.7
N$2  (via drill 0.3 pad 0.7)
  Top 0.2: D1.A 25.5,32.4 v25.3,32.6
  Bottom 0.2: D1.A 25.5,32.4 v25.3,32.6
N$3
  Bottom 0.2: Y1.3 20.1,36.2 20.1,35.7 18.9,34.5 U1.8
N$4  (via drill 0.3 pad 0.7)
  Top 0.2: R3.1 27.5,32.3 v27.8,32.6
  Bottom 0.2: R3.1 27.5,32.3 v27.8,32.6
N$5
  Bottom 0.5: U4.4 25.15,23.9 C8.1
N$6
  Top 0.2: U5.6 27.45,11.45 27.6,11.3 28.1,11.3 28.4,11 28.4,10.45 R6.2
N$7
  Bottom 0.2: R4.2 17.9,15.55 17.9,16.45 U$22.4
N$8  (via drill 0.3 pad 0.7)
  Top 0.2: D4.C 23.25,29.5 v22.4,29.5
  Bottom 0.2: v22.4,29.5 23.45,29.5 R7.2
N$10
  Bottom 0.2: U$22.3 17.85,19.1 R10.2 R9.1
N$14
  pour Bottom (no thermals): 12.8,19.5 13.4,19.5 14.1,18.8 14.5,18.4 14.5,17.3 15.1,17.3 15.6,17.8 16.1,18.3 16.1,19.7 15.7,19.7 15.7,19.65 15.1,19.05 14.75,19.05 13.6,20.2 13.4,20.4 12.8,20.4
P0_0  (via drill 0.3 pad 0.7)
  Top 0.2: 33,14.7 U2.P0_0 33,14.6 v33,12.5 | v28.6,29.5 29.6,28.5 33.9,28.5 v34.5,29.1
  Bottom 0.2: R3.2 27.55,29.5 v28.6,29.5 | v34.5,29.1 32.6,27.2 32.6,24.1 33,23.7 v33,12.5
P2_1  (via drill 0.3 pad 0.7)
  Top 0.2: U2.P2_1 35.45,29.35 v35.6,29.5
  Bottom 0.2: CC-DEBUGGER.8 35.06,30.04 v35.6,29.5
P2_2  (via drill 0.3 pad 0.7)
  Top 0.2: U2.P2_2 v36.7,29.1
  Bottom 0.2: CC-DEBUGGER.10 36.33,30.47 36.7,30.1 v36.7,29.1
PROG
  Bottom 0.2: R5.1 U3.5 | R5.1
RST  (via drill 0.3 pad 0.7)
  Top 0.2: v33.8,38.5 34.5,37.8 S1.3 S1.4 34.36,30.95 R1.1
  Route15 0.2: v13.1,30.85 14,31.75 14,33.1 17.8,36.9 32.2,36.9 32.3,37 32.95,37.65 v33.8,38.5
  Bottom 0.2: CC-DEBUGGER.5 v33.8,38.5 C1.2 | U1.29 12.7,30.2 13.1,30.6 v13.1,30.85
RST_BLE  (via drill 0.3 pad 0.7)
  Top 0.2: U2.RESET v34.2,12.5
  Bottom 0.2: CC-DEBUGGER.9 36.33,35.17 37.5,34 37.5,28.8 35.25,26.55 R8.1 34.2,24.7 v34.2,12.5
RX  (via drill 0.3, 0.3 pad 0.7)
  Top 0.2: JP1.3 26.77,33.7 v27.8,33.7 | 15.68,16.6 S3.6 15.4,16.33 15.4,16.2 14.25,15.05 v14,15.05
  Route15 0.2: U$7.1 26.7,42.7 26.7,41.6 22.4,37.3 17.6,37.3 16.9,38 15.7,38 15.3,37.6 15.3,36.7 10.9,31.5 10.9,30 v10.5,29.6
  Bottom 0.2: U1.30 11,31 10.85,30.85 10.85,29.95 v10.5,29.6 | v27.8,33.7 28.2,34.1 28.2,41 26.2,43 26.2,44.1 U$7.1 | v14,15.05 13.15,15.05 12.3,15.9 11.2,17.1 9.8,20.1 9.1,22.1 9.1,25.9 10.5,27.3 v10.5,29.6 | v10.5,29.6 10.8,29.9
RXB  (via drill 0.3 pad 0.7)
  Top 0.2: U5.4 27.95,9.95 v27.25,10.65 | v26.7,16.9 U2.P0_5
  Bottom 0.2: v27.25,10.65 26.7,11.2 v26.7,16.9
RXB-LS
  Top 0.2: U5.1 26.45,8.25 26.2,8 22.8,8 21.3,9.5 19.68,9.5 S3.2
SCK  (via drill 0.3 pad 0.7)
  Route15 0.2: v24.3,26.4 28.6,30.7 v29.35,30.7 30.1,31.4 40,31.4 42.7,28.7 42.7,17.9 42.4,17.6 U$21.1
  Bottom 0.2: CC-DEBUGGER.3 32.52,37.78 32.3,38 30.7,38 29.7,37 29.7,31.05 v29.35,30.7 29.35,28.9 28.65,28.2 27,28.2 R2.2 | v24.3,26.4 23.5,25.6 18.92,25.6 18.92,25.53 U1.17
STAT
  Bottom 0.2: U3.1 23.94,38.16 24.7,37.4 24.7,35.8 24.3,35.4 23.1,35.4 21.9,34.2 21.9,32.85 R7.1
TX  (via drill 0.3, 0.3 pad 0.7)
  Top 0.2: 29,34.11 JP1.2 29.06,36.94 27.4,38.6 24.2,38.6 20.3,42.5 | 20.3,42.5 U$8.1 | S3.3 15.7,12.3 v14.9,13.15 | v10.1,30.6 11.1,31.6 13.5,31.6 13.9,32 13.9,33 17.5,36.6 17.5,39.7 20.3,42.5
  Bottom 0.2: U1.31 10.9,31.8 10.1,31 v10.1,30.6 9.35,29.85 8.7,28.6 8.7,21.9 9.4,19.8 10.8,16.8 14.45,13.15 v14.9,13.15
TXB
  Top 0.2: U2.P0_4 U5.5
TXB-LS
  Top 0.2: U5.8 26.45,12.2 25.4,12.2 24.5,13.1 21.73,13.1 S3.5
VBATT  (via drill 0.3 pad 0.7)
  Top 0.5: v9.65,27.55 9.6,27.5 9,26.9 9,25.3 10.35,23.95 S2.1 9.85,23.39 9.85,18.73 S2.4 | JP4.2 14.09,30.39 12.35,28.65 v9.65,28.65
  Top 1: v9.65,28.65 9.6,28.6 9.6,27.5
  Bottom 0.5: U3.3 25.84,40.54 C10.1 26.1,40.9
  other vias: 25.9,42.05 24.9,42.05
  pour Route15 (rank 5): 8,27 arc-80 23.7,42.7 27.7,42.7 25.3,40.3 23,38.1 15.6,38 14.7,37.2 10.9,31.8 10.9,26.4 8,26.4
  pour Bottom (no thermals): 24.6,42.4 26.1,42.4 26.6,41.9 26.6,41.2 25.7,41.2 25.3,41.6 25.2,41.7 24.6,41.7 24.5,41.8 24.5,42.3
  pour Top (no thermals): 15.1,30.8 14.2,30.8 12.2,28.8 10.1,28.8 9.85,29.05 8.8,29.05 8.5,28.75 8.5,19.15 9.9,17.75 10.75,17.75 10.75,18.85 10,19.6 10,22.6 10.75,23.35 10.75,23.75 9.5,25 9.5,26.9 9.8,27.2 12.1,27.2 15.1,30.2
VCC  (via drill 0.3 pad 0.7)
  Top 0.5: S2.5 S2.2 | S2.5 12.8,18.19 v12.8,16.6 | v20,23.7 20,22.4 C2.A 18.5,22.4 v18.5,23.7 | S2.5 12.82,18.2 v11.7,18.2
  Route15 0.8: v18.5,23.7 19.15,23.05 19.15,22.85 | v11.7,18.2 12.8,17.1 v12.8,16.6 14,16.6 v14.3,16.3 15,16.3 19.15,20.45 19.15,22.85 | v20,23.7 19.15,22.85
  Bottom 0.2: C17.1 15.7,14.75 15.7,12.9 16.2,12.4 17.25,12.4 R4.1
  Bottom 0.5: U4.3 20.05,23.85 v20,23.7 20,22.6 20.65,21.95 U4.1
  pour Top (no thermals): 18,21.9 18,24 18.1,24.1 20.3,24.1 20.4,24 20.4,21.9
  pour Bottom (no thermals): 12.5,19.1 11.5,19.1 11.2,18.8 11.2,18.2 11.9,17.5 11.9,17 12.8,16.1 13.1,15.8 14.2,15.8 14.3,15.8 14.9,15.2 15.5,15.2 16.05,15.75 16.05,17.1 15.6,17.1 15.4,16.9 14,16.9 13.3,17.6 13,17.9 13,18.5 13,18.6
  pour Route15 (no thermals): 10.9,18.7 10.9,17.8 13.7,15 15.3,15 21.3,21 21.3,25 20.3,26 17.4,26 15.7,24.3 15.7,20.5 14.5,19.3 11.5,19.3
  pour Top (no thermals): 12.45,24.35 12.45,19.95 11.3,18.8 11.3,16.9 12.1,16.1 12.2,16 12.8,16 13.1,16.3 13.25,16.45 13.25,18 13.25,24.35

## Text on the board
Top: TOP
Route2: 2
Route15: 3
Bottom: BOT
tPlace: 0/rx | 1/tx | a5 | 2 | a4 | a3 | 3 | a2 | 4 | - | a1 | On | + | a0 | 13 | 5 | 6 | 12 | Ext | Int | 11 | 7 | 8 | 10 | 9